# Altium PCB M3 ICE.PcbDoc (part 2 of 2)
Units mil, origin at the board's own origin, x right, y up, seen from the top; angles counter-clockwise.
Board outline 4160 x 4350 mil, 4 copper layers (Top Layer, Mid-Layer 1, Mid-Layer 2, Bottom Layer); 240 components, 243 nets, 943 pads, 137 vias.
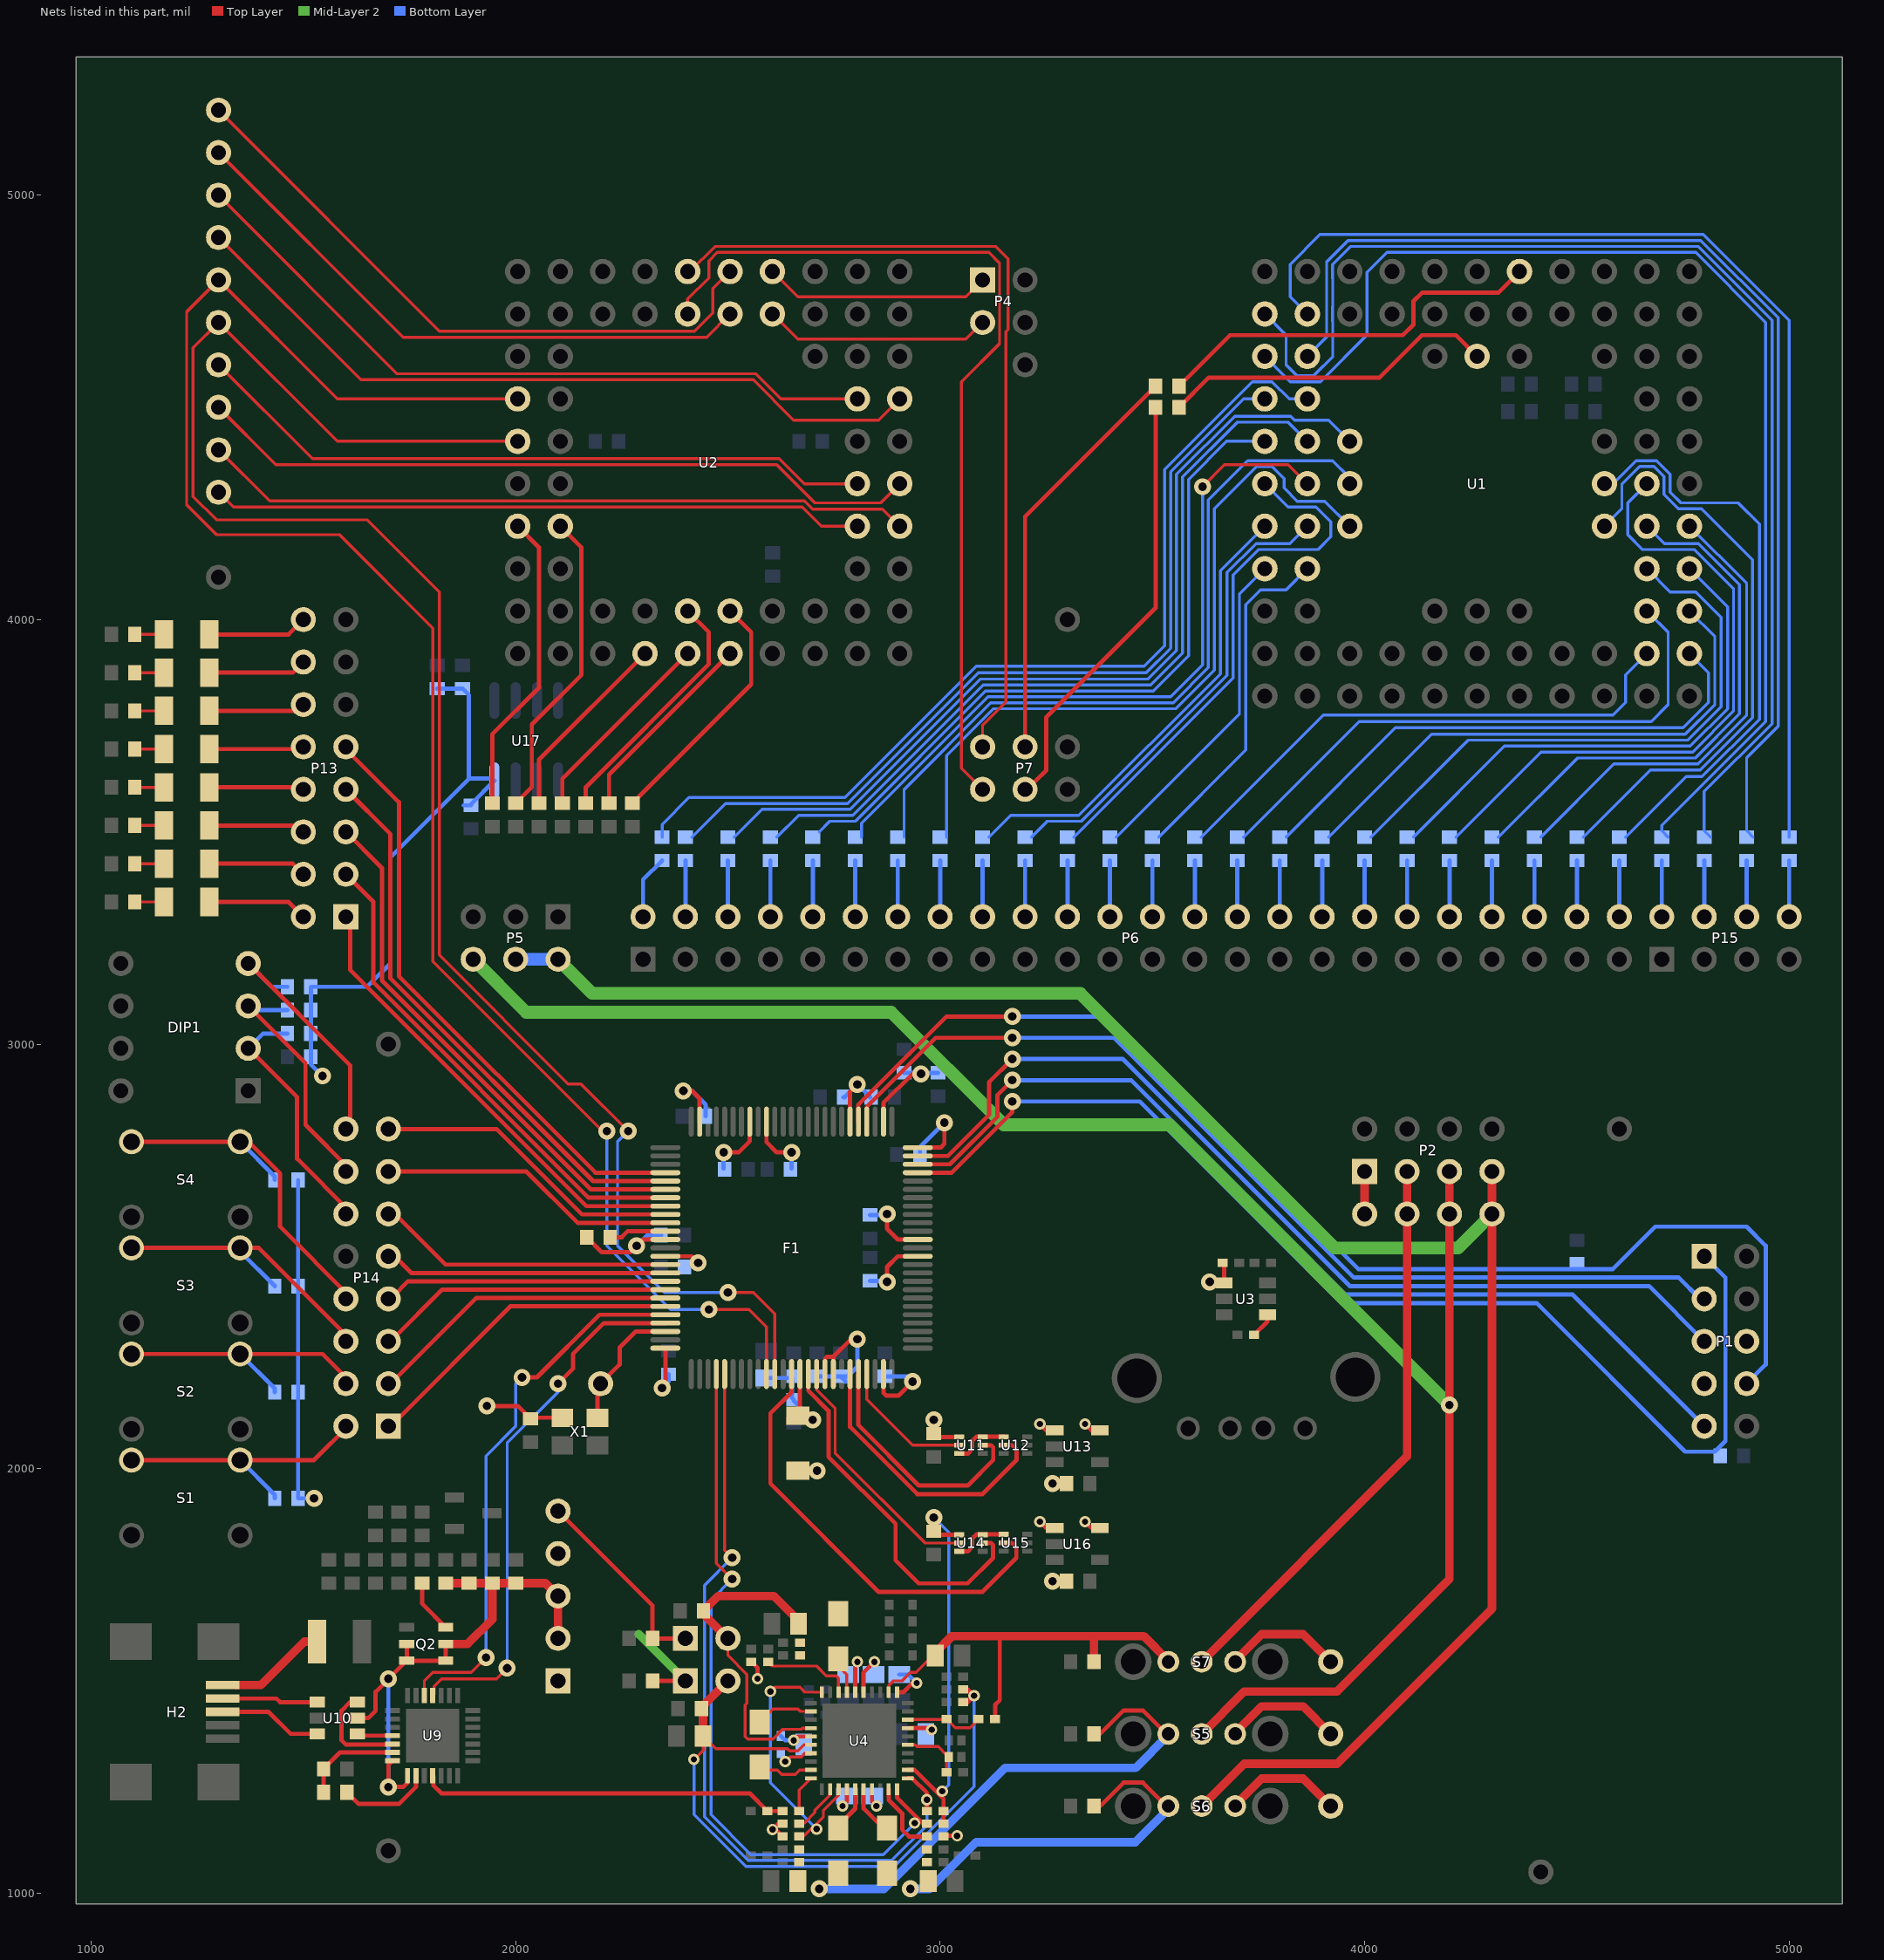
[diagram p4: the nets of this part, all layers, seen from the top]

## Via types
v1: diameter 40, hole 20, Top Layer to Bottom Layer, 90 vias
v2: diameter 27, hole 15, Top Layer to Bottom Layer, 37 vias
v3: diameter 27, hole 15, Top Layer to Bottom Layer, tented bottom, 6 vias
v4: diameter 200, hole 120, Top Layer to Bottom Layer, 4 vias

## Nets (pads, with @x,y where several pads share a name; then routed paths per layer and width w, separated by ;. In a path a pad name is that pad's centre, name@x,y a point inside that pad or via, vN(x,y) a via of type N, cw(c..) or ccw(c..) an arc to the next point about the centre after c; other vN are vias at no path point) (continued)
NetDIP1_2: DIP1.2 P14.12 R70.2 | length 591.3
  Top Layer w10: DIP1.2@1370,2990 1485,2875 1485,2730 P14.12@1610,2605
  Bottom Layer w10: DIP1.2@1370,2990 1405,3025 R70.2@1462.44,3025
NetDIP1_3: DIP1.3 P14.14 R71.2 | length 581
  Top Layer w10: DIP1.3@1370,3090 1505,2955 1505,2810 P14.14@1610,2705
  Bottom Layer w10: DIP1.3@1370,3090 1380,3080 R71.2@1462.44,3080
NetDIP1_4: DIP1.4 P14.16 R72.2 | length 599.6
  Top Layer w10: DIP1.4@1370,3190 1610,2950 P14.16@1610,2805
  Bottom Layer w10: DIP1.4@1370,3190 1425,3135 R72.2@1462.44,3135
NetF1_79: F1.79 P13.9 | length 1423.9
  Top Layer w10: P13.9@1587.5,3707.5 1725,3570 1725,3160 2187.83,2697.17 F1.79@2352.76,2697.17
NetF1_80: F1.80 P13.7 | length 1334
  Top Layer w10: P13.7@1600,3600 1705,3495 1705,3155 2182.52,2677.48 F1.80@2352.76,2677.48
NetF1_81: F1.81 P13.5 | length 1263.9
  Top Layer w10: P13.5@1595,3505 1685,3415 1685,3150 2177.2,2657.8 F1.81@2352.76,2657.8
NetF1_82: F1.82 P13.3 | length 1182.6
  Top Layer w10: P13.3@1605,3405 1605,3395 1665,3335 1665,3145 2171.89,2638.11 F1.82@2352.76,2638.11
NetF1_83: F1.83 P13.1 | length 1083.3
  Top Layer w10: P13.1@1610,3285 1610,3175 2166.57,2618.43 F1.83@2352.76,2618.43
NetF1_84: F1.84 P14.15 | length 736.1
  Top Layer w10: P14.15@1700,2800 1955,2800 2156.26,2598.74 F1.84@2352.76,2598.74
NetF1_85: F1.85 P14.13 | length 702.9
  Top Layer w10: P14.13@1700,2700 2025,2700 2145.94,2579.06 F1.85@2352.76,2579.06
NetF1_90: F1.90 P14.11 | length 694.3
  Top Layer w10: P14.11@1710,2605 1834.37,2480.63 F1.90@2352.76,2480.63
NetF1_91: F1.91 P14.9 | length 661
  Top Layer w10: P14.9@1710,2505 1754.06,2460.94 F1.91@2352.76,2460.94
NetF1_92: F1.92 P14.7 | length 657.8
  Top Layer w10: P14.7@1710,2405 1746.26,2441.26 F1.92@2352.76,2441.26
NetF1_93: F1.93 P14.5 | length 691
  Top Layer w10: P14.5@1710,2305 1826.57,2421.57 F1.93@2352.76,2421.57
NetF1_94: F1.94 P14.3 | length 724.3
  Top Layer w10: P14.3@1710,2205 1906.89,2401.89 F1.94@2352.76,2401.89
NetF1_95: F1.95 P14.1 | length 757.6
  Top Layer w10: P14.1@1710,2105 1987.2,2382.2 F1.95@2352.76,2382.2
NetF2_1: F2.1 H2.1 | length 234.3
  Top Layer w20: H2.1@1340,1490 1400,1490 1502.56,1592.56 F2.1@1531.85,1592.56
NetH2_2: H2.2 U10.1 | length 196.3
  Top Layer w10: H2.2@1340,1458.5 1436.5,1458.5 1445.04,1449.96 U10.1@1532.76,1449.96
NetH2_3: H2.3 U10.3 | length 214.2
  Top Layer w10: H2.3@1340,1427.01 1417.99,1427.01 1469.84,1375.16 U10.3@1532.76,1375.16
NetI1_1: I1.1 U4.7 | length 70.1
  Top Layer w7: I1.1@2760,1535 2780.32,1514.68 U4.7@2780.32,1473.35
NetI2_1: I2.1 U4.25 | length 102.6
  Top Layer w10: I2.1@2760,1158.94 2800,1198.94 U4.25@2800,1245
NetI3_1: I3.1 U4.26 | length 110.9
  Top Layer w10: U4.26@2819.68,1245 2819.68,1199.25 I3.1@2865.79,1153.15
NetI4_1: I4.1 U4.12 | length 135.9
  Top Layer w7: I4.1@2575,1403.15 2605.85,1434 2664.94,1434 2670.87,1428.07 U4.12@2695.67,1428.07
NetI4_2: I4.2 U4.19 | length 121.1
  Top Layer w7: I4.2@2585,1295 2589.72,1290.28 2616.21,1290.28 2626.49,1280 2658.91,1280 2669.18,1290.28 U4.19@2695.67,1290.28
NetLED1_1: LED1.1 P13.2 | length 236.3
  Top Layer w10: LED1.1@1278.15,3335 1465,3335 P13.2@1500,3300
NetLED1_2: LED1.2 R1.2 | length 69.3
  Top Layer w7: R1.2@1102.56,3335 LED1.2@1171.85,3335
NetLED2_1: LED2.1 P13.4 | length 232.2
  Top Layer w10: LED2.1@1278.15,3425 1475,3425 P13.4@1500,3400
NetLED2_2: LED2.2 R2.2 | length 69.3
  Top Layer w7: R2.2@1102.56,3425 LED2.2@1171.85,3425
NetLED3_1: LED3.1 P13.6 | length 228.1
  Top Layer w10: LED3.1@1278.15,3515 1485,3515 P13.6@1500,3500
NetLED3_2: LED3.2 R3.2 | length 69.3
  Top Layer w7: R3.2@1102.56,3515 LED3.2@1171.85,3515
NetLED4_1: LED4.1 P13.8 | length 216.9
  Top Layer w10: LED4.1@1278.15,3605 P13.8@1495,3605
NetLED4_2: LED4.2 R4.2 | length 69.3
  Top Layer w7: R4.2@1102.56,3605 LED4.2@1171.85,3605
NetLED5_1: LED5.1 P13.10 | length 216.9
  Top Layer w10: LED5.1@1278.15,3695 P13.10@1495,3695
NetLED5_2: LED5.2 R5.2 | length 69.3
  Top Layer w7: R5.2@1102.56,3695 LED5.2@1171.85,3695
NetLED6_1: LED6.1 P13.12 | length 228.1
  Top Layer w10: LED6.1@1278.15,3785 1485,3785 P13.12@1500,3800
NetLED6_2: LED6.2 R6.2 | length 69.3
  Top Layer w7: R6.2@1102.56,3785 LED6.2@1171.85,3785
NetLED7_1: LED7.1 P13.14 | length 232.2
  Top Layer w10: LED7.1@1278.15,3875 1475,3875 P13.14@1500,3900
NetLED7_2: LED7.2 R7.2 | length 69.3
  Top Layer w7: R7.2@1102.56,3875 LED7.2@1171.85,3875
NetLED8_1: LED8.1 P13.16 | length 236.3
  Top Layer w10: LED8.1@1278.15,3965 1465,3965 P13.16@1500,4000
NetLED8_2: LED8.2 R8.2 | length 69.3
  Top Layer w7: R8.2@1102.56,3965 LED8.2@1171.85,3965
NetP4_1: P4.1 U2.D1 | length 536
  Top Layer w7: U2.D1@2605,4820 2664.5,4760.5 3060.5,4760.5 P4.1@3100,4800
NetP4_3: P4.3 U2.D2 | length 536
  Top Layer w7: U2.D2@2605,4720 2664.5,4660.5 3060.5,4660.5 P4.3@3100,4700
NetP6_2: P6.2 R17.2 | length 151.1
  Bottom Layer w10: P6.2@2300,3300 2300,3387.44 R17.2@2345,3432.44
NetP6_4: P6.4 R18.2 | length 132.4
  Bottom Layer w10: P6.4@2400,3300 R18.2@2400,3432.44
NetP6_6: P6.6 R19.2 | length 132.4
  Bottom Layer w10: P6.6@2500,3300 R19.2@2500,3432.44
NetP6_8: P6.8 R20.2 | length 132.4
  Bottom Layer w10: P6.8@2600,3300 R20.2@2600,3432.44
NetP6_10: P6.10 R21.2 | length 132.4
  Bottom Layer w10: P6.10@2700,3300 R21.2@2700,3432.44
NetP6_12: P6.12 R22.2 | length 132.4
  Bottom Layer w10: P6.12@2800,3300 R22.2@2800,3432.44
NetP6_14: P6.14 R23.2 | length 132.4
  Bottom Layer w10: P6.14@2900,3300 R23.2@2900,3432.44
NetP6_16: P6.16 R24.2 | length 132.4
  Bottom Layer w10: P6.16@3000,3300 R24.2@3000,3432.44
NetP6_18: P6.18 R25.2 | length 132.4
  Bottom Layer w10: P6.18@3100,3300 R25.2@3100,3432.44
NetP6_20: P6.20 R26.2 | length 132.4
  Bottom Layer w10: P6.20@3200,3300 R26.2@3200,3432.44
NetP6_22: P6.22 R27.2 | length 132.4
  Bottom Layer w10: P6.22@3300,3300 R27.2@3300,3432.44
NetP6_24: P6.24 R28.2 | length 132.4
  Bottom Layer w10: P6.24@3400,3300 R28.2@3400,3432.44
NetP6_26: P6.26 R29.2 | length 132.4
  Bottom Layer w10: P6.26@3500,3300 R29.2@3500,3432.44
NetP6_28: P6.28 R30.2 | length 132.4
  Bottom Layer w10: P6.28@3600,3300 R30.2@3600,3432.44
NetP6_30: P6.30 R31.2 | length 132.4
  Bottom Layer w10: P6.30@3700,3300 R31.2@3700,3432.44
NetP6_32: P6.32 R32.2 | length 132.4
  Bottom Layer w10: P6.32@3800,3300 R32.2@3800,3432.44
NetP6_34: P6.34 R33.2 | length 132.4
  Bottom Layer w10: P6.34@3900,3300 R33.2@3900,3432.44
NetP6_36: P6.36 R34.2 | length 132.4
  Bottom Layer w10: P6.36@4000,3300 R34.2@4000,3432.44
NetP6_38: P6.38 R35.2 | length 132.4
  Bottom Layer w10: P6.38@4100,3300 R35.2@4100,3432.44
NetP6_40: P6.40 R36.2 | length 132.4
  Bottom Layer w10: P6.40@4200,3300 R36.2@4200,3432.44
NetP6_42: P6.42 R37.2 | length 132.4
  Bottom Layer w10: P6.42@4300,3300 R37.2@4300,3432.44
NetP6_44: P6.44 R38.2 | length 132.4
  Bottom Layer w10: P6.44@4400,3300 R38.2@4400,3432.44
NetP6_46: P6.46 R39.2 | length 132.4
  Bottom Layer w10: P6.46@4500,3300 R39.2@4500,3432.44
NetP6_48: P6.48 R40.2 | length 132.4
  Bottom Layer w10: P6.48@4600,3300 R40.2@4600,3432.44
NetP7_1: P7.1 U2.F1 | length 1946.3
  Top Layer w7: U2.F1@2405,4820 2410.2,4820 2469.2,4879 3131,4879 3160,4850 3160,4816.61 ; P7.1@3100,3720 3100,3751.2 3155,3806.2 3155,4678.45 3159.97,4683.42 3159.97,4716.58 ; 3159.97,4783.42 3159.97,4816.58 ; 3160,4716.61 3160,4783.39
NetP7_2: P7.2 R41.2 | length 957.6
  Top Layer w10: P7.2@3200,3720 3200,4242.99 3507.01,4550 R41.2@3507.44,4550
NetP7_4: P7.4 U2.F2 | length 2150.8
  Top Layer w7: U2.F2@2405,4720 2405,4755 2455,4805 2455,4845 2475,4865 3115,4865 3140.03,4839.97 3140.03,4766.12 ; P7.4@3102.5,3597.5 3050.2,3649.8 3050.2,4560.2 3140.03,4650.03 3140.03,4716.58 ; 3140,4716.61 3140,4766.1
NetP7_5: P7.5 R42.2 | length 997
  Top Layer w10: 3225,3620 3250,3645 3250,3770 3507.44,4027.44 R42.2@3507.44,4500
NetP14_2: P14.2 R65.2 S1.1 | length 674
  Top Layer w10: S1.1@1095,2020 S1.1@1350.91,2020 1525,2020 P14.2@1610,2105
  Bottom Layer w10: S1.1@1350.91,2020 1432.44,1938.46 R65.2@1432.44,1930
NetP14_4: P14.4 R66.2 S2.1 | length 665.7
  Top Layer w10: S2.1@1095,2270 S2.1@1350.91,2270 1545,2270 P14.4@1610,2205
  Bottom Layer w10: S2.1@1350.91,2270 1432.44,2188.46 R66.2@1432.44,2180
NetP14_6: P14.6 R67.2 S3.1 | length 727.8
  Top Layer w10: S3.1@1095,2520 S3.1@1350.91,2520 1395,2520 P14.6@1610,2305
  Bottom Layer w10: S3.1@1350.91,2520 1350.91,2511.54 R67.2@1432.44,2430
NetP14_8: P14.8 R68.2 S4.1 | length 863.2
  Top Layer w10: S4.1@1095,2770 S4.1@1350.91,2770 1370,2770 1445,2695 1445,2570 P14.8@1610,2405
  Bottom Layer w10: S4.1@1350.91,2770 1432.44,2688.46 R68.2@1432.44,2680
NetP15_2: P15.2 R73.2 | length 132.4
  Bottom Layer w10: P15.2@4700,3300 R73.2@4700,3432.44
NetP15_4: P15.4 R74.2 | length 132.4
  Bottom Layer w10: P15.4@4800,3300 R74.2@4800,3432.44
NetP15_6: P15.6 R75.2 | length 132.4
  Bottom Layer w10: P15.6@4900,3300 R75.2@4900,3432.44
NetP15_8: P15.8 R76.2 | length 132.4
  Bottom Layer w10: P15.8@5000,3300 R76.2@5000,3432.44
NetQ2_3: Q2.3 R59.2 | length 126.5
  Top Layer w10: R59.2@1780,1730 1780,1681.3 Q2.3@1835,1626.3
NetR17_1: R17.1 U1.K4 | length 2242
  Bottom Layer w7: R17.1@2345,3487.56 2345,3517.56 2408.44,3581 2776,3581 3085,3890 3480.4,3890 3529,3938.6 3529,4353.8 3735.7,4560.5 3781.78,4560.5 3822.28,4520 U1.K4@3865,4520
NetR18_1: R18.1 U1.L4 | length 2020.9
  Bottom Layer w7: R18.1@2415,3487.56 2494.44,3567 2782,3567 3090,3875 3485.2,3875 3543,3932.8 3543,4348 3715,4520 U1.L4@3765,4520
NetR19_1: R19.1 U1.J5 | length 2128.2
  Bottom Layer w7: R19.1@2515,3487.56 2580.44,3553 2788,3553 3095,3860 3490,3860 3557,3927 3557,4342 3694,4479 3825.8,4479 3834.8,4470 3915,4470 U1.J5@3965,4420
NetR20_1: R20.1 U1.K5 | length 1916.6
  Bottom Layer w7: R20.1@2615,3487.56 2666.44,3539 2794.2,3539 3101.2,3846 3496,3846 3571,3921 3571,4336 3700,4465 3820,4465 U1.K5@3865,4420
NetR21_1: R21.1 U1.L5 | length 1674.2
  Bottom Layer w7: R21.1@2715,3500 2740,3525 2800,3525 3107,3832 3502,3832 3585,3915 3585,4330 3675,4420 U1.L5@3765,4420
NetR22_1: R22.1 U1.K6 | length 1697.1
  Top Layer w7: v1(3618,4313) 3670,4365 3820,4365 U1.K6@3865,4320
  Bottom Layer w7: R22.1@2815,3487.56 2815,3520 3113,3818 3543,3818 3618,3893 v1(3618,4313)
NetR23_1: R23.1 U1.J6 | length 1745.4
  Bottom Layer w7: R23.1@2915,3487.56 2915,3599.8 3119.2,3804 3549.2,3804 3632,3886.8 3632,4282 3724.5,4374.5 3924.5,4374.5 3965,4334 U1.J6@3965,4320
NetR24_1: R24.1 U1.J7 | length 1718.2
  Bottom Layer w7: R24.1@3015,3487.56 3015,3680 3125,3790 3555,3790 3646,3881 3646,4261 3745.5,4360.5 3781.78,4360.5 3810,4332.28 3810,4310 3841,4279 3906,4279 U1.J7@3965,4220
NetR25_1: R25.1 U1.L7 | length 1095.6
  Bottom Layer w7: R25.1@3115,3487.56 3166.44,3539 3326.84,3539 3660,3872.16 3660,4115 U1.L7@3765,4220
NetR26_1: R26.1 U1.K7 | length 1095.4
  Bottom Layer w7: R26.1@3215,3487.56 3252.44,3525 3332.64,3525 3676,3868.36 3676,4110.8 3744.2,4179 3824,4179 U1.K7@3865,4220
NetR27_1: R27.1 U1.L6 | length 1267.3
  Bottom Layer w7: R27.1@3315,3487.56 3690,3862.56 3690,4105 3750,4165 3890,4165 3920,4195 3920,4230 3885,4265 3820,4265 U1.L6@3765,4320
NetR28_1: R28.1 U1.L8 | length 777.4
  Bottom Layer w7: R28.1@3415,3487.56 3705,3777.56 3705,4060 U1.L8@3765,4120
NetR29_1: R29.1 U1.K8 | length 812.6
  Bottom Layer w7: R29.1@3515,3487.56 3720,3692.56 3720,4035 3755,4070 3815,4070 U1.K8@3865,4120
NetR30_1: R30.1 U1.B10 | length 1267.2
  Bottom Layer w7: R30.1@3615,3487.56 3902.44,3775 4585,3775 4615,3805 4615,3870 U1.B10@4665,3920
NetR31_1: R31.1 U1.B9 | length 1370.1
  Bottom Layer w7: R31.1@3715,3487.56 3987.44,3760 4675,3760 4715,3800 4715,3970 U1.B9@4665,4020
NetR32_1: R32.1 U1.A10 | length 1260.1
  Bottom Layer w7: R32.1@3815,3487.56 4072.44,3745 4750,3745 4810,3805 4810,3875 U1.A10@4765,3920
NetR33_1: R33.1 U1.A9 | length 1284.3
  Bottom Layer w7: R33.1@3915,3487.56 4157.44,3730 4755,3730 4825,3800 4825,3960 U1.A9@4765,4020
NetR34_1: R34.1 U1.B8 | length 1385
  Bottom Layer w7: R34.1@4015,3487.56 4243.44,3716 4761,3716 4840,3795 4840,4005 4780,4065 4720,4065 U1.B8@4665,4120
NetR35_1: R35.1 U1.A8 | length 1232.6
  Bottom Layer w7: R35.1@4115,3487.56 4329.44,3702 4767,3702 4855,3790 4855,4030 U1.A8@4765,4120
NetR36_1: R36.1 U1.B6 | length 1506.2
  Bottom Layer w7: R36.1@4215,3487.56 4415.44,3688 4773,3688 4869,3784 4869,4073.28 4777.28,4165 4655,4165 4620,4200 4620,4275 U1.B6@4665,4320
NetR37_1: R37.1 U1.B7 | length 1267.5
  Bottom Layer w7: R37.1@4315,3487.56 4501.44,3674 4779,3674 4883,3778 4883,4082 4786,4179 4706,4179 U1.B7@4665,4220
NetR38_1: R38.1 U1.A7 | length 1105
  Bottom Layer w7: R38.1@4415,3487.56 4587.44,3660 4785,3660 4900,3775 4900,4085 U1.A7@4765,4220
NetR39_1: R39.1 U1.C7 | length 1443.8
  Bottom Layer w7: R39.1@4515,3487.56 4673.44,3646 4790.8,3646 4914,3769.2 4914,4141 4794,4261 4739.2,4261 4705.5,4294.7 4705.5,4303.22 4705.5,4336.78 4681.78,4360.5 4648.22,4360.5 4643.96,4356.24 4606,4318.28 4606,4261 U1.C7@4565,4220
NetR40_1: R40.1 U1.C6 | length 1364.1
  Bottom Layer w7: U1.C6@4565,4320 4585,4320 4639.5,4374.5 4687.57,4374.5 4719.5,4342.57 4719.5,4300.5 4745,4275 4880,4275 4930,4225 4930,3765 4795,3630 4757.44,3630 R40.1@4615,3487.56
NetR41_1: R41.1 U1.E1 | length 946.5
  Top Layer w10: R41.1@3562.56,4550 3682.56,4670 4090,4670 4115,4695 4115,4750 4135,4770 4315,4770 U1.E1@4365,4820
NetR42_1: R42.1 U1.F3 | length 793.6
  Top Layer w10: R42.1@3562.56,4500 3562.99,4500 3632.99,4570 4035,4570 4135,4670 4215,4670 U1.F3@4265,4620
NetR51_2: R51.2 R53.1 U4.38 | length 183
  Top Layer w7: U4.38@2924.02,1408.39 2924.63,1409 R53.1@3015.32,1409 ; R53.1@3015.32,1410 3035.66,1389.66 3070.85,1389.66 R51.2@3090.31,1409.13
NetR54_2: R54.2 R55.1 U4.35 | length 141.4
  Top Layer w7: U4.35@2924.02,1349.33 2940.67,1349.33 2945,1345 2995.31,1345 3015.31,1325 R54.2@3015.31,1285
NetR62_1: R62.1 U9.9 | length 216.9
  Top Layer w10: R62.1@1602.56,1237.56 1630.12,1210 1725,1210 1765.12,1250.12 U9.9@1765.12,1276.46
NetR73_1: R73.1 U1.L3 | length 2805.5
  Bottom Layer w7: U1.L3@3765,4620 3824.5,4560.5 3895.5,4560.5 4005.5,4670.5 4005.5,4817.78 4052.72,4865 4780,4865 4945,4700 4945,3760 4700,3515 4700,3502.56 R73.1@4715,3487.56
NetR74_1: R74.1 U1.L2 | length 2912.1
  Bottom Layer w7: U1.L2@3765,4720 3815,4670 3815,4600 3840,4575 3880,4575 3925,4620 3925,4702.72 3924.5,4703.22 3924.5,4736.78 3925,4737.28 3925,4802.72 3924.5,4803.22 3924.5,4836.78 3966.72,4879 4786,4879 4960,4705 4960,3755 4800,3595 4800,3502.56 R74.1@4815,3487.56
NetR75_1: R75.1 U1.K3 | length 2661.4
  Bottom Layer w7: U1.K3@3865,4620 3910.5,4665.5 3910.5,4842.57 3960.93,4893 4791.8,4893 4974,4710.8 4974,3749 4900,3675 4900,3502.56 R75.1@4915,3487.56
NetR76_1: R76.1 U1.K2 | length 2639.3
  Bottom Layer w7: U1.K2@3865,4720 3824.5,4760.5 3824.5,4836.78 3894.72,4907 4798,4907 5000,4705 R76.1@5000,3487.56
NetR79_2: R79.2 U2.E9 | length 589.1
  Top Layer w10: R79.2@2275,3567.56 2555,3847.56 2555,3970 U2.E9@2505,4020
NetR80_2: R80.2 U2.E10 | length 470.5
  Top Layer w10: R80.2@2220,3567.56 2220,3635 U2.E10@2505,3920
NetR81_2: R81.2 U2.F9 | length 593.3
  Top Layer w10: R81.2@2165,3567.56 2165,3605 2455,3895 2455,3970 U2.F9@2405,4020
NetR82_2: R82.2 U2.F10 | length 474.6
  Top Layer w10: R82.2@2110,3567.56 2110,3625 U2.F10@2405,3920
NetR83_2: R83.2 U2.G10 | length 456
  Top Layer w10: R83.2@2055,3567.56 2055,3670 U2.G10@2305,3920
NetR84_2: R84.2 U2.J7 | length 737.4
  Top Layer w10: R84.2@2000,3567.56 2038,3605.56 2038,3753 2155,3870 2155,4170 U2.J7@2105,4220
NetR85_2: R85.2 U2.K7 | length 718.7
  Top Layer w10: R85.2@1945,3567.56 1945,3730 2055,3840 2055,4170 U2.K7@2005,4220
NetR88_1: R88.1 U4.22 | length 105.2
  Top Layer w7: 2680,1165 2705,1190 2705,1195 2740.94,1230.94 U4.22@2740.94,1245
NetR89_1: R89.1 U4.29 | length 165
  Top Layer w10: U4.29@2878.74,1245 2878.74,1219.53 2910.62,1187.65 2910.62,1149.38 2926.65,1133.35 R89.1@2960.12,1133.35
NetR90_1: R90.1 U4.17 | length 68.8
  Top Layer w7: v2(2635,1310) 2646,1321 2673.16,1321 2681.8,1329.65 U4.17@2695.67,1329.65
NetR91_1: R91.1 U4.8 | length 214.9
  Top Layer w7: R91.1@2594.68,1545 2604.68,1535 2708.85,1535 2732.03,1511.82 2755,1511.82 2760.63,1506.19 U4.8@2760.63,1473.35
NetR92_1: R92.1 R93.1 U9.11 | length 870.9
  Top Layer w10: U9.11@1804.49,1276.46 1806.27,1274.68 1806.27,1253.77 1825.04,1235 2551.46,1235 R92.1@2593.11,1193.35 R93.1@2628.74,1193.35
NetR94_1: R94.1 U3.1 | length 60.6
  Top Layer w10: R94.1@3739.68,2315 3771.18,2346.5 U3.1@3771.18,2362.6
NetS5_1: S5.1 TP12.1 | length 277.8
  Top Layer w20: S5.1@3695,1377.61 3757.39,1440 3855,1440 TP12.1@3920,1375
NetS6_1: S6.1 TP13.1 | length 280.4
  Top Layer w20: S6.1@3695,1205 3695,1207.61 3757.39,1270 3855,1270 TP13.1@3920,1205
NetS7_1: S7.1 TP15.1 | length 277.8
  Top Layer w20: S7.1@3695,1547.61 3757.39,1610 3855,1610 TP15.1@3920,1545
NetTP2_1: TP2.1 U2.B4 | length 1718.8
  Top Layer w7: TP2.1@1285,5000 TP2.1@1300,5000 1721,4579 2566,4579 2625,4520 U2.B4@2805,4520
NetTP3_1: TP3.1 U2.A6 | length 1716.8
  Top Layer w7: TP3.1@1300,4500 1435,4365 2615,4365 2705,4275 2860,4275 U2.A6@2905,4320
NetTP4_1: TP4.1 U2.E1 | length 1527.3
  Top Layer w7: TP4.1@1285,5200 TP4.1@1300,5200 1820.5,4679.5 2421.78,4679.5 2464.5,4722.22 2464.5,4779.5 U2.E1@2505,4820
NetTP6_1: TP6.1 U2.A4 | length 1803.8
  Top Layer w7: TP6.1@1300,4900 1635,4565 2560,4565 2655,4470 2855,4470 U2.A4@2905,4520
NetTP7_1: TP7.1 U2.B6 | length 1621
  Top Layer w7: TP7.1@1300,4600 1521,4379 2621,4379 2680,4320 U2.B6@2805,4320
NetTP8_1: TP8.1 U2.E2 | length 1423
  Top Layer w7: TP8.1@1285,5100 TP8.1@1300,5100 1735,4665 2450,4665 U2.E2@2505,4720
NetTP10_1: TP10.1 U2.B7 | length 1538.1
  Top Layer w7: TP10.1@1300,4300 1335,4265 2675,4265 2720,4220 U2.B7@2805,4220
NetTP11_1: TP11.1 U2.A7 | length 1680
  Top Layer w7: TP11.1@1300,4400 1420.5,4279.5 2121.78,4279.5 2122.28,4280 2680,4280 2699.5,4260.5 2864.5,4260.5 U2.A7@2905,4220
NetU9_4: U9.4 U10.4 | length 84.5
  Top Layer w10: U10.4@1627.24,1375.16 1631.46,1370.94 U9.4@1710,1370.94
NetU9_5: U9.5 U10.6 | length 239.9
  Top Layer w10: U10.6@1627.24,1449.96 1609.96,1449.96 1590,1430 1590,1360 1599.64,1350.36 1709.1,1350.36 U9.5@1710,1351.26
NetU11_3: U11.3 U11.6 U12.1 | length 133.4
  Top Layer w10: U11.6@3044.88,2035 3065,2035 3075,2045 3075,2065 3085,2075 U12.1@3150,2075
NetU14_3: U14.3 U14.6 U15.1 | length 133.4
  Top Layer w10: U14.6@3044.88,1805 3065,1805 3075,1815 3075,1835 3085,1845 U15.1@3150,1845
PMU_ON: R93.2 U4.20 | length 88.7
  Top Layer w7: R93.2@2668.11,1193.35 2668.11,1243.03 U4.20@2695.67,1270.59
PMU_SCL: F1.5 R86.1 U4.31 | length 1839.7
  Top Layer w7: F1.5@2492.52,2222.76 2492.52,1807.48 v1(2510,1790)
  Top Layer w10: U4.31@2924.02,1270.59 2934.41,1270.59 2968.74,1236.26 v2(2968.74,1220) R86.1@2968.74,1193.35
  Bottom Layer w7: v1(2510,1790) 2445,1725 2445,1180 2548,1077 2885.94,1077 2968.74,1159.8 v2(2968.74,1220)
PMU_SDA: F1.4 R58.1 U4.30 | length 1730.7
  Top Layer w7: F1.4@2472.83,2222.76 2472.83,1777.17 v1(2510,1740)
  Top Layer w10: U4.30@2898.43,1245 2898.43,1225.04 R58.1@2960.12,1163.35
  Bottom Layer w7: v1(2510,1740) 2459.97,1689.97 2459.97,1185.03 2554,1091 2866,1091 v2(2940,1165)
POR: F1.86 R9.1 | length 136.1
  Top Layer w10: R9.1@2222.56,2545 2250,2545 2264.37,2559.37 F1.86@2352.76,2559.37
SCL_DIG: F1.10 TP5.1 U2.K4 | length 4279.2
  Top Layer w7: U2.K4@2005,4520 1580,4520 TP5.1@1300,4800 1225,4725 1225,4270 1295,4200 1585,4200 1805,3980 1805,3195 2205,2795 v1(2215,2795) ; v1(2455,2375) 2550,2375 2590.94,2334.06 F1.10@2590.94,2222.76
  Bottom Layer w7: v1(2215,2795) 2215,2525 2365,2375 v1(2455,2375)
SCL_PD: F1.21 U11.2 | length 578.8
  Top Layer w10: F1.21@2807.48,2222.76 2807.48,2102.52 2950,1960 3065,1960 3125,2020 3125,2050 3120,2055 3100.31,2055 U11.2@3100,2055.31
SCL_PU: F1.22 U11.5 | length 322.2
  Top Layer w7: F1.22@2827.17,2222.76 2827.17,2162.83 2934.69,2055.31 U11.5@3044.88,2055.31
SCL_TRI: F1.20 U12.2 | length 674.7
  Top Layer w10: F1.20@2787.8,2222.76 2787.8,2098.16 2945.96,1940 3100,1940 3180,2020 3180,2045 3169.68,2055.32 U12.2@3150,2055.32
SDA_DIG: F1.11 TP9.1 U2.K5 | length 4260.1
  Top Layer w7: U2.K5@2005,4420 1580,4420 TP9.1@1300,4700 1240,4640 1240,4290 1295,4235 1650,4235 1820,4065 1820,3210 2123.75,2906.25 2153.75,2906.25 v1(2265,2795) ; v1(2500,2415) 2560,2415 2610.63,2364.37 F1.11@2610.63,2222.76
  Bottom Layer w7: v1(2265,2795) 2240,2770 2240,2525 2350,2415 v1(2500,2415)
SDA_PD: F1.15 U14.2 | length 857.5
  Top Layer w10: F1.15@2689.37,2222.76 2689.37,2183.71 2737.11,2135.97 2737.11,2027.89 2895,1870 2895,1784.37 2949.69,1729.68 3064.69,1729.68 3124.69,1789.68 3124.69,1819.68 3119.69,1824.68 U14.2@3100,1824.68
SDA_PU: F1.16 U14.5 | length 584.2
  Top Layer w7: F1.16@2709.06,2222.76 2709.06,2185.94 2752.61,2142.39 2752.61,2036.63 2964.56,1824.68 U14.5@3044.88,1824.68
SDA_TRI: F1.13 U15.2 | length 1056.3
  Top Layer w10: F1.13@2650,2222.76 2650,2180 2600,2130 2600,1965 2855.32,1709.68 3099.69,1709.68 3179.69,1789.68 3179.69,1814.68 3169.37,1825 U15.2@3149.69,1825
SYS_CLK: F1.98 TP1.1 X1.3 | length 310.3
  Top Layer w10: X1.3@2192.68,2119.96 2192.68,2192.68 2245,2245 2245,2285 2283.15,2323.15 F1.98@2352.76,2323.15
TCK: F1.47 P1.1 R10.1 | length 2794.7
  Top Layer w10: F1.47@2947.24,2697.17 3027.17,2697.17 3170,2840 v1(3170,2865)
  Bottom Layer w10: v1(3170,2865) 3470,2865 3945,2390 4405,2390 4755,2040 4825,2040 4850,2065 4850,2450 P1.1@4800,2500
TDI: F1.48 P1.9 | length 2302.3
  Top Layer w10: F1.48@2947.24,2716.85 3022.81,2716.85 3135,2829.04 3135,2880 v1(3170,2915)
  Bottom Layer w10: v1(3170,2915) 3450,2915 3955,2410 4490,2410 P1.9@4800,2100
TDO: F1.54 P1.3 | length 2320.1
  Top Layer w10: F1.54@2827.17,2817.24 2827.17,2852.41 2989.76,3015 v1(3170,3015)
  Bottom Layer w10: v1(3170,3015) 3410,3015 3975,2450 4740,2450 P1.3@4790,2400
TMS: F1.49 P1.5 | length 2267.9
  Top Layer w10: F1.49@2947.24,2736.54 3018.45,2736.54 3115,2833.08 3115,2910 v1(3170,2965)
  Bottom Layer w10: v1(3170,2965) 3430,2965 3965,2430 4670,2430 P1.5@4800,2300
TRST: F1.55 P1.8 R11.1 | length 2913.9
  Top Layer w10: F1.55@2807.48,2817.24 2807.48,2857.48 3015,3065 v1(3170,3065)
  Bottom Layer w10: v1(3170,3065) 3390,3065 3985,2470 4585,2470 4685,2570 4900,2570 4945,2525 4945,2245 P1.8@4900,2200
USB_UART_RXD: F1.97 U9.25 | length 1265.4
  Top Layer w7: U9.25@1804.49,1465.43 1807.77,1468.71 1807.77,1487.5 1825.27,1505 1955,1505 v1(1980,1530)
  Top Layer w10: v1(2100,2200) 2135,2235 2135,2270 2207.83,2342.83 F1.97@2352.76,2342.83
  Bottom Layer w7: v1(1980,1530) 1980,2060.2 2100,2180.2 v1(2100,2200)
USB_UART_TXD: F1.96 U9.26 | length 1296.5
  Top Layer w7: U9.26@1784.8,1465.43 1784.8,1499.8 1805,1520 1895,1520 v1(1930,1555)
  Top Layer w10: v1(2015,2215) 2050,2215 2197.52,2362.52 F1.96@2352.76,2362.52
  Bottom Layer w7: v1(1930,1555) 1930,2030 2000,2100 2000,2200 v1(2015,2215)
VCC_1P2: C3.2 C4.2 C5.2 C6.2 C9.2 C10.2 C11.2 C12.2 C13.2 C14.2 C26.2 C54.2 C55.2 C56.2 C57.2 F1.17 F1.18 F1.24 F1.37 F1.39 F1.50 F1.66 F1.68 F1.74 F1.89 FB1.1 P16.1 R58.2 R86.2 TP18.1 U4.32 U11.4 U13.1 U13.5 U14.4 U16.1 U16.5 | length 3268.4
  Top Layer w10: TP18.1@2100,1900 2322.56,1677.44 C26.2@2322.56,1600 P16.1@2400,1600 ; F1.89@2352.76,2500.32 2414.68,2500.32 v1(2430,2485) ; v1(2395,2890) 2415,2890 2433.46,2871.54 F1.74@2433.46,2817.24 ; v1(2490,2745) 2525,2745 2551.57,2771.57 F1.68@2551.57,2817.24 ; F1.66@2590.94,2817.24 2590.94,2769.06 2615,2745 v1(2650,2745) ; FB1.1@2665,1985 FB1.1@2665,1995 ; F1.17@2728.74,2222.76 2728.74,2258.74 2733.43,2263.43 2748.43,2263.43 ; F1.18@2748.43,2222.76 2748.43,2263.43 ; v1(2805,2305) 2790,2305 2748.43,2263.43 ; F1.24@2866.54,2222.76 2866.54,2178.46 2873,2172 2902,2172 v1(2935,2205) ; v1(2875,2440) 2875,2475 2900.32,2500.32 F1.37@2947.24,2500.32 ; v1(2875,2600) 2875,2565 2900.32,2539.68 F1.39@2947.24,2539.68 ; U4.32@2924.02,1290.28 2940,1290.28 3008.11,1222.17 R86.2@3008.11,1193.35 R58.2@3008.11,1163.35 ; F1.50@2947.24,2756.22 3001.22,2756.22 3010,2765 v1(3010,2815) ; C56.2@2985,1852.56 2993.19,1844.37 U14.4@3044.88,1844.37 ; C54.2@2993.19,2074.37 U11.4@3044.88,2074.37 ; v3(3235,1875) 3250,1860 U16.1@3270,1860 ; v3(3235,2105) 3250,2090 U13.1@3270,2090 ; v3(3341.3,1875) 3356.3,1860 U16.5@3376.3,1860 ; v3(3341.3,2105) 3356.3,2090 U13.5@3376.3,2090
  Bottom Layer w7: v1(2985,1885) 3020,1850 3020,1255 v2(3005,1240)
  Bottom Layer w10: v1(2395,2890) 2415,2890 2447.56,2857.44 C10.2@2447.56,2830 ; C5.2@2490,2707.44 v1(2490,2745) ; C9.2@2650,2707.44 v1(2650,2745) ; C3.2@2710,2217.44 C13.2@2765,2217.44 ; C13.2@2777.44,2205 C13.2@2765,2217.44 ; v1(2805,2305) 2805,2240 2782.44,2217.44 C13.2@2765,2217.44 ; C4.2@2835,2442.44 v1@2872.56,2442.44 ; C11.2@2835,2597.56 v1@2872.56,2597.56 ; C14.2@2870,2217.44 2922.56,2217.44 v1(2935,2205) ; C12.2@2952.56,2740 2952.56,2757.56 v1(3010,2815)
  other v1: 3265,1735 3265,1965 2710,1995 2985,2115
VCC_2102: C50.2 R62.2 U9.6 | length 233.7
  Top Layer w10: R62.2@1547.44,1237.56 C50.2@1547.44,1292.56 1586.46,1331.57 U9.6@1710,1331.57
VCC_B0: C1.2 C7.2 C8.2 C17.2 C18.2 C19.2 C20.2 C34.2 C61.2 F1.52 F1.56 F1.87 F1.100 P1.6 P1.7 P11.1 R9.2 R65.1 R66.1 R67.1 R68.1 R69.1 R70.1 R71.1 R72.1 R77.1 R78.1 TP17.1 U17.8 X1.4 | length 3418.3
  Top Layer w10: v1(1932.44,2147.56) 2005,2147.56 2032.6,2119.96 X1.4@2110,2119.96 ; R9.2@2167.44,2545 2202.44,2510 2270,2510 v1(2285,2525) 2299.68,2539.68 F1.87@2352.76,2539.68 ; C34.2@2322.56,1500 P11.1@2400,1500 ; v1(2345,2190) 2352.76,2197.76 F1.100@2352.76,2283.78 ; F1.56@2787.8,2817.24 2787.8,2887.8 v1(2805,2905) ; F1.52@2866.54,2817.24 2866.54,2861.54 2935,2930 v1(2955,2930)
  Mid-Layer 2 w20: 2290,1610 P11.1@2400,1500
  Bottom Layer w10: R68.1@1487.56,2680 R67.1@1487.56,2430 R66.1@1487.56,2180 R65.1@1487.56,1930 v1(1525,1930) ; v1(1545,2925) 1517.56,2952.44 R69.1@1517.56,2970 R70.1@1517.56,3025 R71.1@1517.56,3080 R72.1@1517.56,3135 1650,3135 1705,3190 1705,3440.51 1890,3625.51 ; R78.1@1815,3837.44 R77.1@1875,3837.44 1890,3822.44 1890,3625.51 ; C61.2@1877.56,3562.56 C61.2@1895,3562.56 1895,3565.51 U17.8@1950,3620.51 ; U17.8@1945,3625.51 1890,3625.51 ; v1(2285,2525) 2310,2550 C7.2@2342.44,2550 ; v1(2345,2190) 2360,2205 C8.2@2360,2222.44 ; C20.2@2772.56,2875 2775,2875 v1(2805,2905) C18.2@2835,2875 ; C19.2@2915,2932.44 v1@2952.56,2932.44 ; v1@2957.56,2932.56 C17.2@2995,2932.56
VCC_M3_0P6: P2.3 S7.2 TP21.1 | length 1355.4
  Top Layer w20: S7.2@3616.26,1545 4100,2028.74 P2.3@4100,2700
VCC_M3_1P2: P2.5 P5.6 S5.2 TP16.1 | length 4429.9
  Top Layer w20: S5.2@3616.26,1375 3716.26,1475 3935,1475 4200,1740 TP16.1@4200,2600 P2.5@4200,2700
  Mid-Layer 2 w30: P5.6@1900,3200 2025,3075 2885,3075 3150,2810 3540,2810 v1(4200,2150)
VCC_M3_VBATT: P2.7 P5.2 P5.4 S6.2 TP14.1 | length 4535.3
  Top Layer w20: S6.2@3616.26,1205 3716.26,1305 3935,1305 4300,1670 TP14.1@4300,2600 P2.7@4300,2700
  Mid-Layer 2 w30: P5.2@2100,3200 2180,3120 3330,3120 3930,2520 4220,2520 TP14.1@4300,2600
  Bottom Layer w30: P5.4@2000,3190 P5.4@2010,3200 ; P5.4@2000,3200 P5.4@2010,3200 ; P5.2@2100,3200 P5.4@2010,3200
VCC_PLF: C2.2 C15.2 C16.2 F1.14 FB1.2 | length 267.4
  Top Layer w10: FB1.2@2669.68,2129.61 F1.14@2669.68,2222.76
  Bottom Layer w10: C2.2@2590,2213.5 2651.06,2213.5 C15.2@2651.06,2166.5 ; C15.2@2655,2162.56 2655,2160 v1(2700,2115)
VCC_PRE: C30.1 C33.1 C37.1 C39.1 C40.1 C42.1 C43.1 P8.1 R12.1 R87.2 R88.2 R89.2 R90.2 R91.2 U3.4 U4.1 U4.5 U4.6 U4.15 U4.24 U4.27 U4.37 | length 646.8
  Top Layer w10: R91.2@2555.31,1545 2570,1530.31 v2(2570,1505) ; R87.2@2628.74,1133.35 2612.09,1150 v2(2605,1150) 2618.35,1163.35 R88.2@2628.74,1163.35 ; v2(2655,1360) 2664.02,1369.02 U4.15@2695.67,1369.02 ; v2@2775,1210 2780.31,1215.31 U4.24@2780.31,1245 ; U4.6@2800,1473.35 v2@2800,1540 ; U4.5@2819.68,1473.35 2819.68,1519.68 v2(2845,1545) ; U4.27@2839.37,1245 2839.37,1215.63 v2(2850,1205) ; U4.1@2898.43,1473.35 2913.35,1473.35 2935,1495 v2(2945,1495) ; U4.37@2924.02,1388.7 v2@2976.3,1388.7 ; R89.2@3009.76,1135 v2(3040,1135) ; U3.4@3668.82,2437.4 R12.1@3668.82,2481.5
  Bottom Layer w10: R90.2@2625,1369.69 2634.69,1360 v2(2655,1360) ; C42.1@2903.43,1514.84 2925.16,1514.84 v2(2945,1495)
  other v1: 3635,2440
  other v2: 2770,1205 2980,1385 2805,1545
VCC_SOL: P2.1 TP27.1 | length 100
  Top Layer w20: TP27.1@4000,2600 P2.1@4000,2700
VCC_USB: C46.2 C47.2 C53.2 P8.2 Q2.1 Q2.2 Q2.5 Q2.6 R60.2 TP19.1 U9.7 U9.8 U10.5 | length 1335.5
  Top Layer w10: U10.5@1627.24,1412.56 1652.56,1412.56 1670,1430 1670,1474.09 Q2.6@1743.46,1547.56 ; U9.7@1710,1311.89 1700,1301.89 v1(1700,1250) 1735,1250 U9.8@1745.43,1260.43 ; Q2.5@1743.46,1586.93 Q2.6@1743.46,1547.56 ; Q2.2@1835,1586.93 Q2.1@1835,1547.56 Q2.6@1743.46,1547.56
  Top Layer w20: Q2.2@1835,1586.93 1886.93,1586.93 1945,1645 C46.2@1945,1730 ; R60.2@1835,1730 C47.2@1890,1730 C46.2@1945,1730 ; P8.2@2100,1600 TP19.1@2100,1700 2070,1730 C53.2@2000,1730 C46.2@1945,1730
  Bottom Layer w10: v1(1700,1250) v1(1700,1505)
VCCP_ICE_1P2: C25.2 C27.2 I1.2 P16.2 R14.2 R15.1 U4.14 | length 770.5
  Top Layer w7: P16.2@2500,1600 2500,1560 2545,1515 2545,1447.3 2540.88,1443.18 2540.88,1369.27 2547.03,1363.12 2606.12,1363.12 2629,1386 2672.3,1386 2675,1388.7 U4.14@2695.67,1388.7
  Top Layer w20: P16.2@2500,1600 2442.56,1657.44 R14.2@2442.56,1665 2477.56,1700 2607.82,1700 C27.2@2666.5,1641.33
VCCP_ICE_SYS: C35.2 C44.2 P11.2 R45.2 R49.1 U4.16 | length 1690.6
  Top Layer w7: v2(2420,1315) 2441.5,1336.5 C35.2@2441.5,1370 ; C35.2@2449.65,1361.85 2471.5,1340 2640,1340 2645,1335 2665,1335 2679.33,1349.33 U4.16@2695.67,1349.33
  Top Layer w10: C44.2@3054.69,1450 3065,1450 v2(3080,1465) 3065,1480 R49.1@3054.68,1480
  Top Layer w20: C35.2@2441.5,1370 2441.5,1441.5 P11.2@2500,1500
  Bottom Layer w7: v2(2420,1315) 2410,1315 2420,1305 2420,1185.2 2542.2,1063 2891.74,1063 3080,1251.26 v2(3080,1465)
VCCP_M3_0P6: C38.2 R51.1 R52.2 S7.3 U4.2 | length 1002.6
  Top Layer w7: U4.2@2878.74,1473.35 2878.74,1488.74 2890,1500 2910,1500 2930,1520 2943.5,1520 C38.2@2983.5,1560
  Top Layer w10: R51.1@3129.68,1410 3129.68,1443.62 3140.5,1454.44 3140.5,1605.31
  Top Layer w20: C38.2@2988.5,1560 2988.5,1566.33 3027.49,1605.31 3479.82,1605.31 S7.3@3537.52,1547.61 ; R52.2@3362.56,1545 3362.56,1602.75
VCCP_M3_1P2: C29.2 C36.2 I2.2 R13.2 R44.1 S5.3 | length 1188.9
  Top Layer w10: R13.2@3362.56,1375 3376.63,1375 3431.93,1430.31 3477.75,1430.31 S5.3@3533.06,1375
  Bottom Layer w20: v1(2715,1010) 2867.73,1010 3152.73,1295 3460.13,1295 S5.3@3537.52,1372.39
VCCP_M3_VBATT: C32.2 C41.2 I3.2 R16.2 R47.1 S6.3 | length 901.5
  Top Layer w10: R16.2@3362.56,1205 3376.63,1205 3431.93,1260.31 3477.75,1260.31 S6.3@3533.06,1205
  Bottom Layer w20: v1(2930,1010) 2975,1010 3085,1120 3460,1120 S6.3@3537.52,1197.52
WAKE: R87.1 U4.10 U4.23 | length 665.4
  Top Layer w7: v2(2600,1475) 2610,1485 2670,1485 2681.65,1473.35 U4.10@2721.26,1473.35 ; R87.1@2668.11,1133.35 2678.35,1133.35 2725,1180 2725,1195 2760.63,1230.63 U4.23@2760.63,1245
  Bottom Layer w7: v2@2600,1485 2600,1260 v2(2709.07,1150.93)
pads on no net: D2.2 F1.2 F1.3 F1.53 H2.4 P1.4 P3.2 P3.3 S5.4 S6.4 S7.4 U1.A1 U1.A2 U1.A3 U1.A11 U1.B1 U1.B2 U1.B3 U1.B4 U1.B11 U1.C1 U1.C2 U1.C3 U1.C10 U1.C11 U1.D10 U1.D11 U1.E9 U1.E10 U1.E11 U1.F1 U1.F9 U1.F10 U1.F11 U1.G1 U1.G2 U1.G9 U1.G10 U1.G11 U1.H1 U1.H2 U1.H10 U1.H11 U1.J1 U1.J2 U1.J10 U1.J11 U1.K1 U1.K9 U1.K10 U1.K11 U1.L1 U1.L9 U1.L10 U1.L11 U2.A1 U2.A2 U2.A3 U2.A8 U2.A9 U2.A10 U2.B1 U2.B2 U2.B3 U2.B8 U2.B9 U2.B10 U2.C1 U2.C2 U2.C3 U2.C9 U2.C10 U2.G1 U2.G2 U2.G9 U2.H1 U2.H2 U2.H9 U2.H10 U2.J1 U2.J2 U2.J3 U2.J4 U2.J8 U2.J9 U2.J10 U2.K1 U2.K2 U2.K3 U2.K8 U2.K9 U2.K10 U4.21 U4.28 U9.1 U9.2 U9.10 U9.12 U9.13 U9.14 U9.15 U9.16 U9.17 U9.18 U9.19 U9.20 U9.21 U9.22 U9.23 U9.24 U9.27 U9.28 U12.3 U12.4 U12.5 U15.3 U15.4 U15.5 U17.3 X1.1
copper on no net:
  other v4: 1100,1100 1100,5100 5000,5100

## Polygon pours and split planes (outlines as drawn)
no net on Top Overlay "Mid-Layer 1-No Net" (solid): 4435.36,1554.18 4435.36,1644.59 4469.4,1644.59 4469.4,1774.78 4435.75,1774.53 4435.75,1865.53 4573.75,1865.53 4654.75,1749.46 4733.75,1865.53 4869.75,1865.53 4869.75,1774.53 4839.75,1774.53 4839.75,1644.53 4869.75,1644.53 4869.75,1554.53 4703.75,1554.53 4703.75,1644.53 4741.75,1644.53 4741.75,1720.53 4654.75,1604.81 4567.75,1720.53 4567.75,1644.59 4601.79,1644.59 4601.79,1554.18
M3_VCC_1P2 on Mid-Layer 2 "Mid-Layer 1-No Net" (solid, pour order 16): 4150,2820 4180,2850 4220,2850 4250,2820 4250,2775 4275,2750 4365,2750 4835,3220 4835,4345 4815,4365 4735,4365 4715,4385 4715,4570 4510,4775 4440,4775 4415,4800 4415,4905 4480,4970 4985,4970 5115,4840 5115,2785 4980,2650 4175,2650 4150,2675
M3_VCC_0P6 on Mid-Layer 2 "Mid-Layer 1-No Net" (solid, pour order 20): 3950,2750 4125,2750 4150,2775 4150,2820 4180,2850 4220,2850 4295,2925 4295,4615 4350,4670 4380,4670 4415,4705 4415,4870 4395,4890 4050,4890 3950,4790
M3_VCC_BAT on Mid-Layer 2 "Mid-Layer 1-No Net" (solid, pour order 18): 4295,2920 4250,2875 4250,2775 4275,2750 4365,2750 4835,3220 4835,4345 4815,4365 4735,4365 4715,4385 4715,4570 4510,4775 4440,4775 4415,4750 4415,4705 4380,4670 4350,4670 4295,4615
NetC60_2 on Mid-Layer 2 "Mid-Layer 1-No Net" (solid, pour order 14): 2050,3230 2120,3230 2990,4100 2990,4435 2905,4520 2005,4520 1920,4435 1920,3360
VCC_1P2 on Mid-Layer 2 "Mid-Layer 1-No Net" (solid, pour order 6): 3250,1575 3340,1665 3340,2125 3105,2360 3105,2700 2995,2810 2935,2810 2850,2725 2675,2725 2635,2765 2635,2855 2555,2935 2405,2935 2350,2880 2350,1625 2400,1575
VCC_B0 on Mid-Layer 2 "Mid-Layer 1-No Net" (solid, pour order 8): 4110,1000 5115,2005 5115,2250 4930,2435 4855,2435 4685,2265 4685,2130 3675,1120 2385,1120 2025,1480 2025,1515 2065,1555 2280,1555 2350,1625 2350,2880 2405,2935 2555,2935 2635,2855 2635,2765 2675,2725 2850,2725 2985,2860 2985,2940 2885,3040 1500,3040 1340,2880 1340,2010 2350,1000
VCC_PRE on Mid-Layer 2 "Bottom Layer-No Net 1" (solid, pour order 13): 2065,1555 2025,1515 2025,1480 2385,1120 3075,1120 3725,1770 3725,2455 3685,2495 3595,2495 3340,2240 3340,1667.05 3250,1575 2300,1575 2280,1555
M3_VCC_0P6 on Bottom Layer "Mid-Layer 1-No Net" (solid, pour order 22): 4390,4795 4440,4745 4440,4705 4320,4585 4320,4490 4340,4470 4375,4470 4375,4505 4380,4510 4405,4510 4410,4505 4410,4500 4455,4455 4685,4455 4710,4430 4710,4390 4665,4345 4295,4345 4190,4450 4190,4750 4235,4795
NetC59_2 on Bottom Layer "Mid-Layer 1-No Net" (solid, pour order 12): 1950,3270 1970,3250 2140,3250 2320,3430 2320,3505 2405,3590 2545,3590 2705,3750 2705,4055 2640,4120 2570,4120 2500,4050 2500,3810 2085,3395 1980,3395 1950,3365
NetC58_2 on Bottom Layer "Mid-Layer 1-No Net" (solid, pour order 10): 1805,3305 1860,3250 1930,3250 1950,3270 1950,3365 1983.21,3395 2090,3400 2500,3810 2500,4050 2595,4145 2790,4145 2975,4330 2975,4455 2930,4500 2030,4500 2005,4475 2005,4375 2145,4235 2145,3600 2100,3555 2005,3555 1940,3490 1845,3490 1805,3450
GND on Mid-Layer 1 "Mid-Layer 1-No Net" (solid, pour order 4): 965,975 5125,975 5125,5325 965,5325

## Keep-outs
Keep-Out Layer:
  the board outline again, w10

## Other copper
Top Layer:
  region net VCCP_M3_VBATT: 2880,1075 2915,1110 2975,1110 2975,1010 2965,1000 2910,1000 2880,1030
  region net VCCP_M3_1P2: 2660,1110 2710,1110 2745,1075 2745,1025 2720,1000 2665,1000 2655,1010 2660,1015
  region net VCCP_ICE_1P2: 2650,1660 2745,1685 2745,1630 2660,1555 2660,1600

## Silkscreen, mask and mechanical layers (free items; w line width, h text height)
Top Overlay:
  rectangle: 3175,3485 3335,3525
  rectangle: 3065,3425 3225,3465
  rectangle: 3480,1000 3640,1040
  rectangle: 3590,1060 3750,1100
  lines w8: 4745,2245 4715,2245 4715,2355 4745,2355
  lines w10: 3880,1205 3880,1545 ; 3960.31,1205 3960.31,1545 ; 3065,3425 3065,3465 3335,3465 3335,3425 3065,3425 ; 3065,3485 3065,3525 3335,3525 3335,3485 3065,3485 ; 3480,1000 3750,1000 3750,1040 3480,1040 3480,1000 ; 3480,1060 3750,1060 3750,1100 3480,1100 3480,1060
  text "SDA_ALG" at 1360,5185 h40
  text "SCL_ALG" at 1360,5085 h40
  text "M3_1.2V" at 1360,4980 h40
  text "M3_0.6V" at 1360,4880 h40
  text "PINT_VMON" at 3050,4870 h40
  text "SDA_DIG" at 1360,4780 h40
  text "1.2V" at 3270,4780 h40
  text "SCL_DIG" at 1360,4685 h40
  text "0.6V" at 3265,4680 h40
  text "ANA1" at 1360,4585 h40
  text "GND" at 3265,4580 h40
  text "ANA0" at 1360,4485 h40
  text "PINT Testpoints" at 1225,4400 h40 r90
  text "ANA1_IN" at 1360,4385 h40
  text "ANA0_IN" at 1360,4285 h40
  text "GND" at 1360,4080 h40
  text "SCL" at 1670,3980 h40
  text "GND" at 3360,3980 h40
  text "SDA" at 1670,3880 h40
  text "M3SDA" at 3390,3700 h40
  text "M3SCL" at 3390,3600 h40
  text "DISCR" at 3365,3485 h40
  text "PINT" at 3365,3425 h40
  text "PINT_1.2V" at 1880,3130 h40 r270
  text "PINT_ABUF" at 1980,3130 h40 r270
  text "PINT_VBATT" at 2080,3130 h40 r270
  text "M3IO_0" at 2280,3125 h40 r270
  text "M3IO_1" at 2380,3125 h40 r270
  text "M3IO_2" at 2480,3125 h40 r270
  text "M3IO_3" at 2580,3125 h40 r270
  text "M3IO_4" at 2680,3125 h40 r270
  text "M3IO_5" at 2780,3125 h40 r270
  text "M3IO_6" at 2880,3125 h40 r270
  text "M3IO_7" at 2980,3125 h40 r270
  text "M3IO_8" at 3080,3125 h40 r270
  text "M3IO_9" at 3205,3125 h40 r270
  text "M3IO_10" at 3280,3125 h40 r270
  text "M3IO_11" at 3380,3125 h40 r270
  text "M3IO_12" at 3480,3125 h40 r270
  text "M3IO_13" at 3580,3125 h40 r270
  text "M3IO_14" at 3680,3125 h40 r270
  text "M3IO_15" at 3780,3125 h40 r270
  text "M3IO_16" at 3880,3125 h40 r270
  text "M3IO_17" at 3980,3125 h40 r270
  text "M3IO_18" at 4080,3125 h40 r270
  text "M3IO_19" at 4180,3125 h40 r270
  text "M3IO_20" at 4280,3125 h40 r270
  text "M3IO_21" at 4380,3125 h40 r270
  text "M3IO_22" at 4480,3125 h40 r270
  text "M3IO_23" at 4580,3125 h40 r270
  text "M3SPI_TXD" at 4680,3125 h40 r270
  text "M3SPI_CLK" at 4780,3125 h40 r270
  text "M3SPI_FSS" at 4880,3125 h40 r270
  text "M3SPI_RXD" at 4980,3125 h40 r270
  text "GND" at 1645,3060 h40
  text "GND" at 4545,2700 h40
  text "FP4" at 4795,2570 h40
  text "M3_VSOL" at 3980,2540 h40 r270
  text "M3_0.6V" at 4080,2540 h40 r270
  text "M3_1.2V" at 4180,2540 h40 r270
  text "M3_VBATT" at 4280,2540 h40 r270
  text "SYS_CLK" at 2180,2515 h40 r270
  text "1.2V" at 2165,1880 h40
  text "3.3V" at 2160,1780 h40
  text "USBV" at 2160,1680 h40
  text "EXT_0.6V" at 3995,1525 h40
  text "M3 ICE & Interface" at 4325,1460 h40
  text "Board" at 4565,1395 h40
  text "EXT_1.2V" at 3995,1355 h40
  text "EXT_VBATT" at 3995,1185 h40
  text "GND" at 1760,1080 h40
  text "EXT_PWR -> M3" at 3780,1060 h40
  text "GND" at 4475,1030 h40
  text "INT_PWR -> M3" at 3785,1000 h40